# Altium PCB RF-Remute-FT.PcbDoc
Units mm, origin at the board's own origin, x right, y up, seen from the top; angles counter-clockwise.
Board outline 30 x 30 mm, 2 copper layers (Top Layer, Bottom Layer); 15 components, 10 nets, 40 pads, 0 vias.
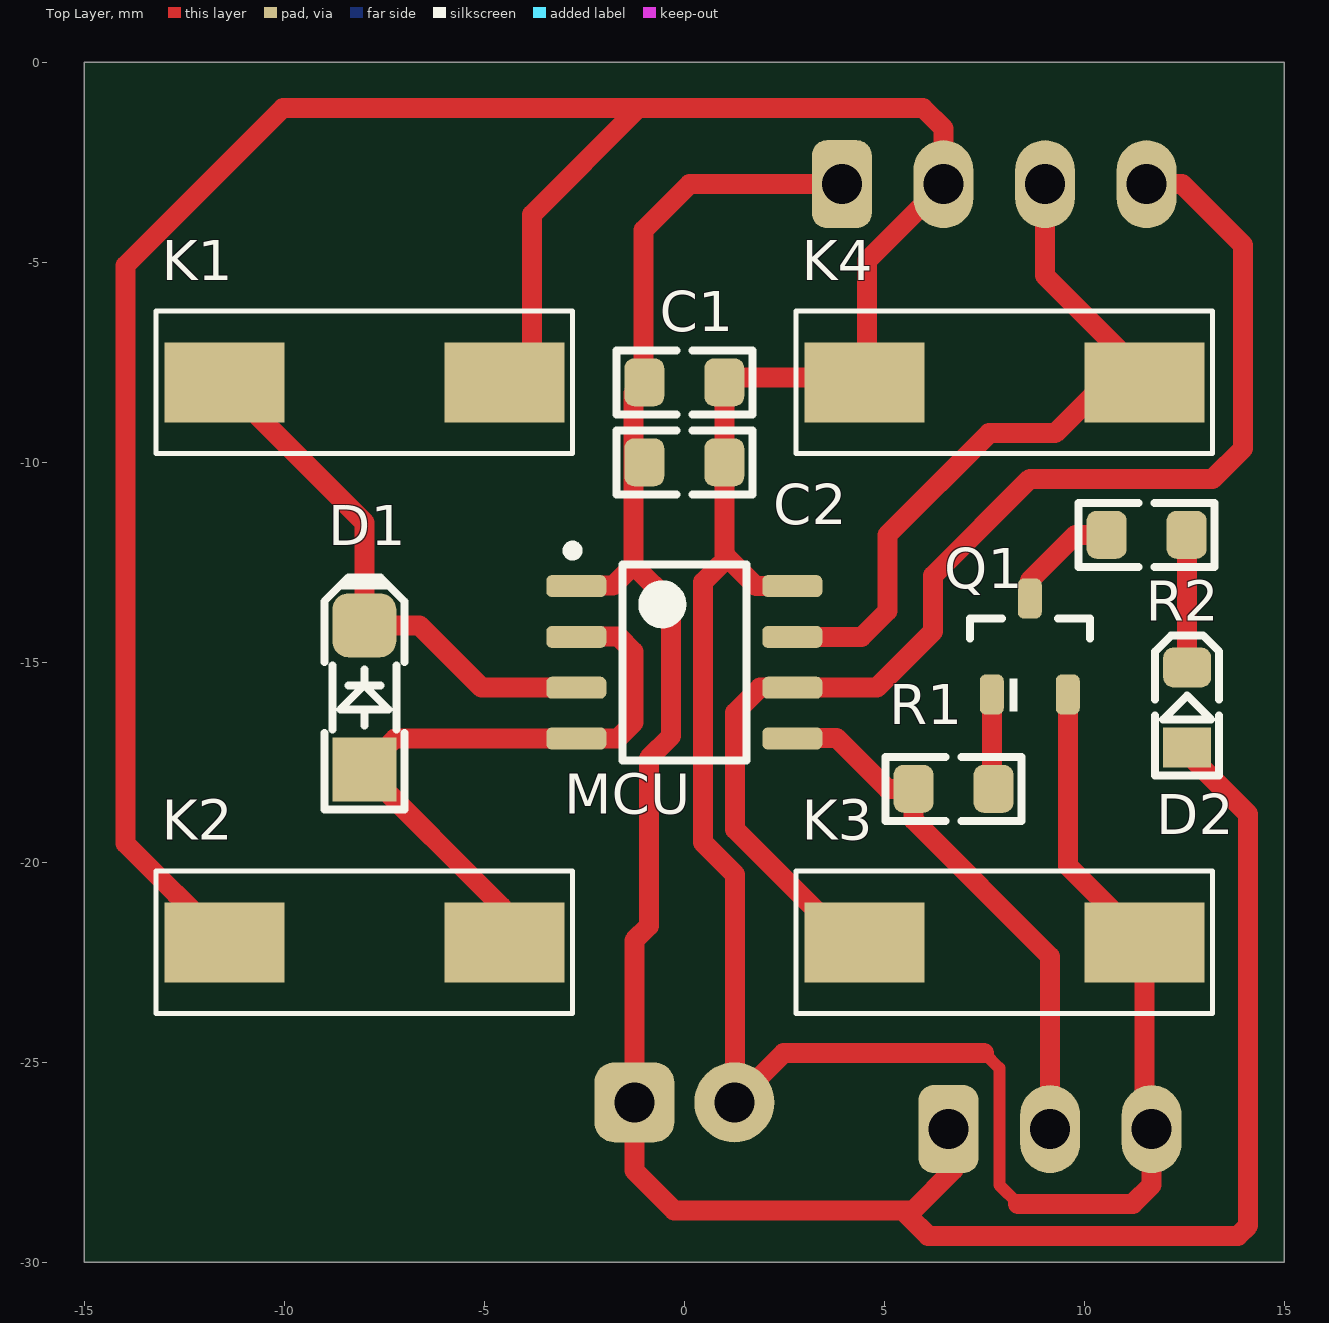
[diagram p0: Top Layer view]
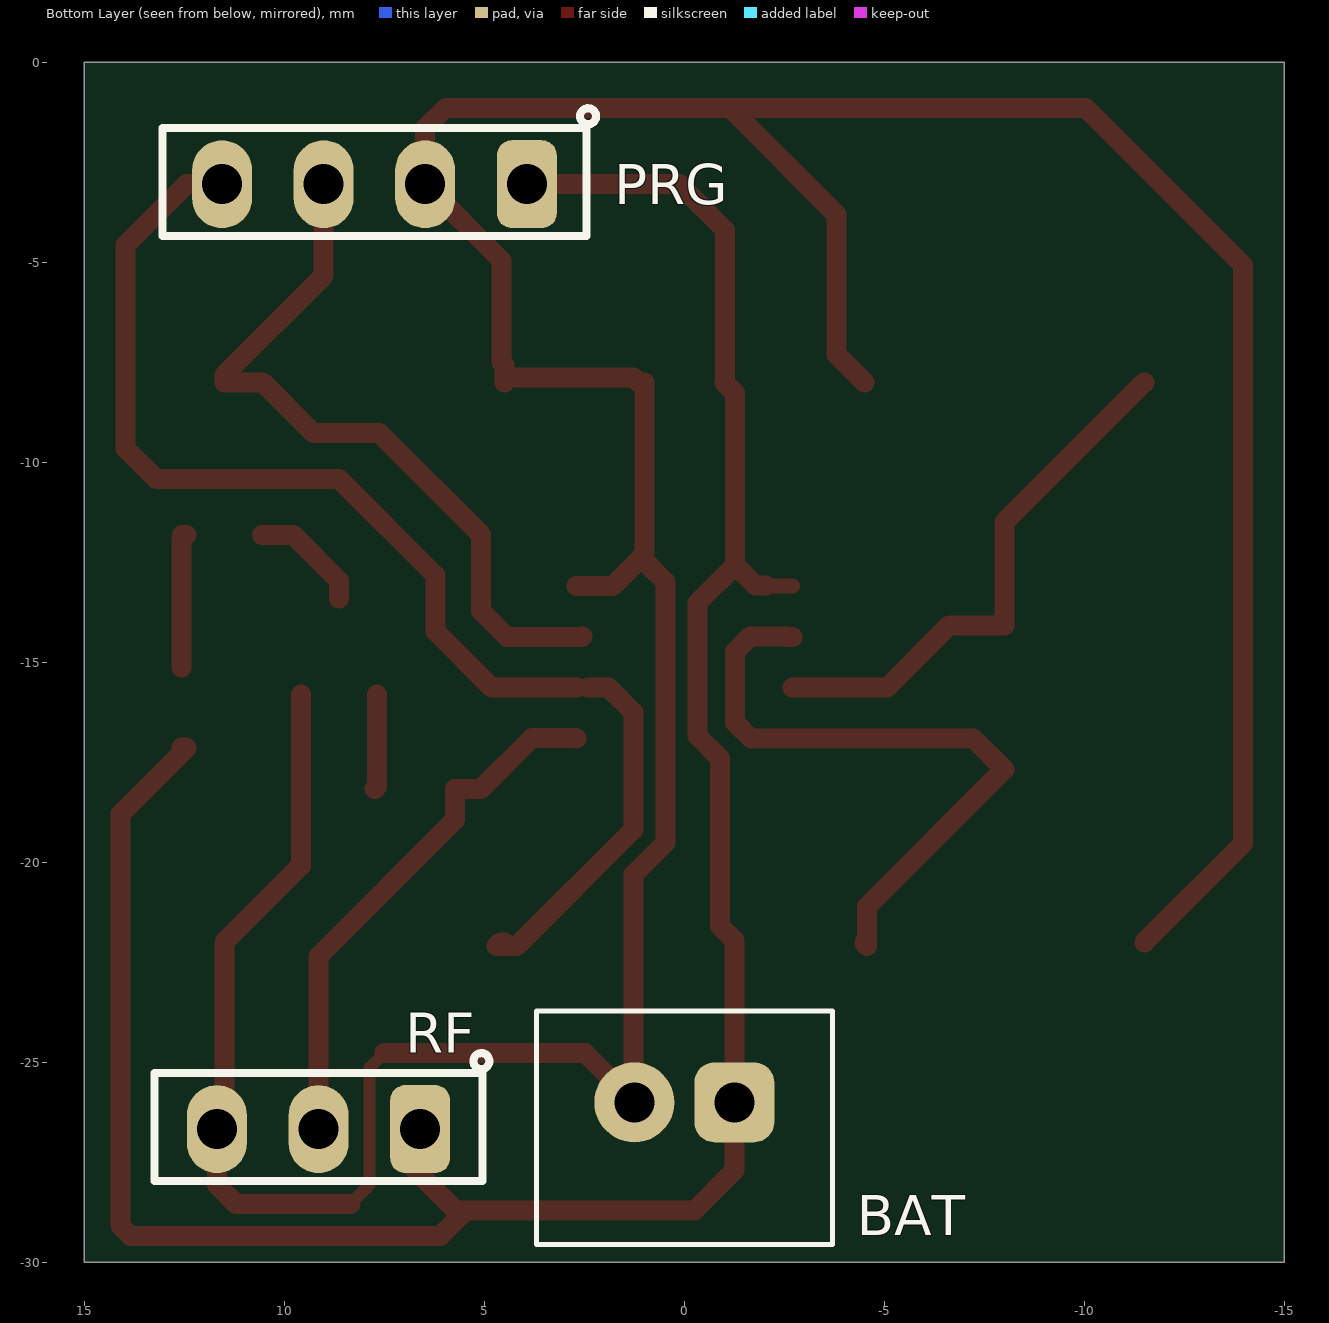
[diagram p1: Bottom Layer view, seen from below]

## Layer stack, top to bottom
Top Solder: solder mask 0.0102, Solder Resist, Dk 3.5
Top Layer: signal copper 0.0356
Dielectric 1: dielectric 0.32, FR-4, Dk 4.8
Bottom Layer: signal copper 0.0356
Bottom Solder: solder mask 0.0102, Solder Resist, Dk 3.5

## Board outline
-15,-30 -15,0 15,0 15,-30

## Design rules (kind name [scope] priority, off if disabled: settings)
Clearance [All] p1: gap=0.3 ignorepadtopadclearanceinfootprint=FALSE
PolygonConnect [All] p1: connectstyle=Relief reliefconductorwidth=0.254 reliefentries=4 polygonreliefangle="90 Angle" airgapwidth=0.254
RoutingVias [All] p1: holewidth=0.711 width=1.27 viastyle="Through Hole" minholewidth=0.711 minwidth=1.27 maxholewidth=0.711 maxwidth=1.27
SolderMaskExpansion [All] p1: expansion=0.102 istentingtop=FALSE
Width [All] p1: maxlimit=0.5 minlimit=0.254 preferedwidth=0.3 toplayer_minwidth=0.3 bottomlayer_maxwidth=0.254 bottomlayer_prefwidth=0.254 minimp=50.000000 maximp=50.000000 favimp=50.000000
30 further rules are at their usual default settings.

## Components (designator, comment, footprint, x,y, rotation, side; value= is the part's Value field where it differs from the comment)
BAT "XH 2" "XH 2 PIN ( White )" 0,-26 r180 bottom
C1 "Capacitor SMD 0805" C0805 0,-8 r180 top value=10uF
C2 "Capacitor SMD 0805" C0805 0,-10 r180 top value=100nF
D1 "1N4148 SMD" D_SOD80 -8.001,-15.875 r90 top value=1N4148
D2 "LED SMD 0805" "LED SMD 0805 (Green)" 12.573,-16.129 r90 top
K1 "Button" BUTTON -8,-8 r180 top
K2 "Button" BUTTON -8,-22 r0 top
K3 "Button" BUTTON 8,-22 r180 top
K4 "Button" BUTTON 8,-8 r0 top
MCU "FT61EC21A" SOP-8 0,-15 r0 top
PRG "Female Header Single 4" HDR_F_1X4 7.747,-3.048 r0 bottom
Q1 "C945 NPN SMD" SOT-23 8.636,-14.605 r90 top value="C945 SMD"
R1 "Resistor SMD 0805" R0805 6.731,-18.161 r180 top value=1K
R2 "Resistor SMD 0805" R0805 11.557,-11.811 r0 top value=1K
RF "Female Header Single 3" HDR_F_1X3 9.144,-26.67 r0 bottom

## Footprints (in the part's own frame and the unit in brackets; to place one, negate y for a bottom-side part, rotate by r counter-clockwise, add the part's x,y. Pads: shape width x height; smd on the part's side, far side on the other; paste and mask are expansions set on the pad)
BUTTON [mm] "KEY"
  rect 3x2 smd: 1(-3.5,0) 2(3.5,0)
  silkscreen extent -5.21,-1.78 5.21,1.78, body extent -5,-1.75 5,1.75, height 4.35
C0805 [mm] "CHIP Capacitor, 2.0X1.3mm, 0805 (Make www.tarahiboard.com)"
  rrect50% 1x1.2 smd mask+0.075: 1(-1,0) 2(1,0)
  Top Layer pour cut-out: -0.5,0.8 0.5,0.8 0.5,-0.8 -0.5,-0.8
  silkscreen extent -1.7,-0.8 1.7,0.8, body extent -1,-0.62 1,0.63, height 1
D_SOD80 [mm] "SOD-80 MINI-MELF 3.6X1.6mm, LL-34, LL4148 (Make www.tarahiboard.com)"
  rect 1.6x1.6 smd: 1(-1.8,0)
  rrect50% 1.6x1.6 smd: 2(1.8,0)
  Top Layer pour cut-out: -1.016,1.016 1.016,1.016 1.016,-1.016 -1.016,-1.016
  silkscreen extent -2.8,-1 3,1, body extent -1.85,-0.8 1.85,0.8, height 2
HDR_F_1X3 [mm] "HEADER FEMALE pitch: 2.54mm (Make www.tarahiboard.com)"
  rrect50% 1.5x2.2 hole 1 mask+0.1: 1(-2.54,0)
  oval 1.5x2.2 hole 1 mask+0.1: 2(0,0) 3(2.54,0)
  silkscreen extent -4.27,-1.9 4.1,1.3, body extent -3.93,-1.3 3.94,1.2, height 8.5
HDR_F_1X4 [mm] "HEADER FEMALE pitch: 2.54mm (Make www.tarahiboard.com)"
  rrect50% 1.5x2.2 hole 1 mask+0.1: 1(-3.81,0)
  oval 1.5x2.2 hole 1 mask+0.1: 2(-1.27,0) 3(1.27,0) 4(3.81,0)
  silkscreen extent -5.54,-1.9 5.3,1.3, body extent -5.2,-1.3 5.21,1.2, height 8.5
"LED SMD 0805 (Green)" [mm] "(Make www.tarahiboard.com)"
  rect 1x1.2 smd mask+0.075: 1(-1,0)
  rrect50% 1x1.2 smd mask+0.075: 2(1,0)
  silkscreen extent -1.7,-0.8 1.8,0.8, body extent -1,-0.63 1,0.63, height 0.7
R0805 [mm] "CHIP RESISTOR 1/8 WATT ,2.0X1.3mm, 0805, 2012 (Make www.tarahiboard.com)"
  rrect50% 1x1.2 smd mask+0.05: 1(-1,0) 2(1,0)
  Top Layer pour cut-out: -0.5,0.8 0.5,0.8 0.5,-0.8 -0.5,-0.8
  silkscreen extent -1.7,-0.8 1.7,0.8, body extent -1.15,-0.67 1.15,0.68, height 0.76
SOP-8 [mm]
  rrect50% 1.5x0.55 smd: 1(-2.7,1.905) 2(-2.7,0.635) 3(-2.7,-0.635) 4(-2.7,-1.905) 5(2.7,-1.905) 6(2.7,-0.635) 7(2.7,0.635) 8(2.7,1.905)
  silkscreen extent -2.92,-2.45 1.55,2.92, body extent -2.99,-2.45 2.99,2.45, height 1.35
SOT-23 [mm] "SOT23, 3-Leads, Body 2.9x1.3mm, Pitch 0.95mm, Lead Span 2.5mm, IPC Medium Density (Make www.tarahiboard.com)"
  rrect50% 1x0.6 smd: 1(-1.2,0.95) 2(-1.2,-0.95) 3(1.2,0)
  silkscreen extent -1.62,-1.5 0.7,1.5, body extent -1.16,-1.45 1.21,1.45, height 1
"XH 2 PIN ( White )" [mm] "(Make www.tarahiboard.com)"
  round 2 hole 1: 1(-1.25,0)
  rrect50% 2x2 hole 1: 2(1.25,0)
  silkscreen extent -3.7,-3.56 3.7,2.29, body extent -3.7,-3.56 3.7,2.24, height 7

## Part data
BAT: library part "Conector XH 2 Pin", "Conector XH 2 Pin", ComponentLink1Description=Tarahiboard, ComponentLink1URL=https://www.tarahiboard.com/product/library-pack, DatasheetVersion=2022
C1 C2: "Capacitor C SMD 0805", ComponentLink1Description=Tarahiboard, ComponentLink1URL=https://www.tarahiboard.com, DatasheetVersion=2022
D1: "DIODE, FAST SWTICHING, 0.3A, 0.5W", ComponentLink1Description=Tarahiboard, ComponentLink1URL=https://www.tarahiboard.com/product/library-pack, DatasheetVersion=2022
K1 K2 K3 K4: library part BUTTON-6.3.4-SMD, Actuator Color=Brown, Contact Current Rating=50mA, Contact Resistance=100mR, Manufacturer=Panasonic, Manufacturer Part Number=EVQ-PE605T, Max Operating Temperature=85°C, Max Voltage Rating (DC)=12V, Min Operating Temperature=-30°C, Operating Force=2.4N, Package Quantity=1000, Supplier Part Number 1=P13592S-ND, Actuator Length=1.5mm, Actuator Type=Standard, Category="Tactile Switches", ComponentLink1Description=https://datasheet.ciiva.com/25603/0900766b810ad3e5-25603911.pdf?src-supplier=RSComponents, ComponentLink1URL=https://datasheet.ciiva.com/25603/0900766b810ad3e5-25603911.pdf?src-supplier=RSComponents, ComponentLink2Description=https://datasheet.ciiva.com/30091/atv0000ce8-30091136.pdf?src-supplier=Onlinecomponents.com, ComponentLink2URL=https://datasheet.ciiva.com/30091/atv0000ce8-30091136.pdf?src-supplier=Onlinecomponents.com, ComponentLink3Description=https://datasheet.ciiva.com/16377/atk0000ce35-16377527.pdf?src-supplier=Future+Electronics, ComponentLink3URL=https://datasheet.ciiva.com/16377/atk0000ce35-16377527.pdf?src-supplier=Future+Electronics, ComponentLink4Description=https://datasheet.ciiva.com/16155/atv0000ce8-16155306.pdf?src-supplier=Onlinecomponents.com, ComponentLink4URL=https://datasheet.ciiva.com/16155/atv0000ce8-16155306.pdf?src-supplier=Onlinecomponents.com, Contact Plating=Silver, Current Rating=50mA, Electrical Life=30000Cycles, Illumination Type=Non-Illuminated,Illuminated, Lead Free="Lead Free", Mechanical Life=30000Cycles, Mount="Through Hole", Orientation=Straight, Packaging=Bulk, Pricing 1="1=0.42000, 10=0.41000, 25=0.38600, 100=0.33510, 250=0.30400, 500=0.28280, 1000=0.25452, 2500=0.23897, 5000=0.22200 (USD)", REACH SVHC="No SVHC", RoHS=Yes, RoHS Compliant=Yes, Series=EVQPE, Size=3.5mm, Stock 1=1845, Supplier 1=Digi-Key, Supplier 2=Digi-Key, Switch Function=Off-Mom, Switch Travel=0.25mm, Termination="PC Pin", Throw Configuration=SPST, Voltage Rating (DC)=12V
PRG RF: "Female, pitch: 2.54mm", ComponentLink1Description=Tarahiboard, ComponentLink1URL=https://www.tarahiboard.com/product/library-pack, DatasheetVersion=2022
D2 Q1: ComponentLink1Description=Tarahiboard, ComponentLink1URL=https://www.tarahiboard.com/product/library-pack, DatasheetVersion=2022
R1 R2: ComponentLink1Description="Website: Tarahiboard", ComponentLink1URL=https://www.tarahiboard.com/product/library-pack, DatasheetVersion=2022

## Nets (pads, with @x,y where several pads share a name; then routed paths per layer and width w, separated by ;. In a path a pad name is that pad's centre, name@x,y a point inside that pad or via, vN(x,y) a via of type N, cw(c..) or ccw(c..) an arc to the next point about the centre after c; other vN are vias at no path point)
COM: D1.1 K2.2 MCU.2 MCU.4 | length 16.6
  Top Layer w0.5: K2.2 -4.5,-22.026 -4.572,-22.098 -4.572,-21.104 D1.1 -7.231,-16.905 MCU.4 -1.665,-16.905 -1.27,-16.51 -1.27,-14.732 -1.651,-14.351 -2.54,-14.351 -2.554,-14.365 MCU.2
DATA: MCU.5 R1.2 RF.2 | length 14.2
  Top Layer w0.5: MCU.5 2.714,-16.891 3.81,-16.891 5.08,-18.161 R1.2 5.731,-18.939 9.144,-22.352 RF.2@9.144,-27.432
GND: BAT.1 C1.1 C2.1 K1.1 K2.1 K3.1 K4.1 MCU.8 PRG.2 Q1.2 RF.3 | length 106.9
  Top Layer w0.3: 7.493,-24.765 7.874,-25.146 7.874,-28.067 8.344,-28.537
  Top Layer w0.5: K2.1 -13.97,-19.53 -13.97,-5.08 -10.033,-1.143 -1.143,-1.143 ; K1.1 -3.81,-7.31 -3.81,-3.81 -1.143,-1.143 ; 0.889,-12.573 0.47,-12.992 0.47,-19.508 1.27,-20.308 1.27,-25.908 1.25,-25.928 BAT.1 2.485,-24.765 7.493,-24.765 ; 1,-12.303 C2.1 C1.1 1.144,-8 1.27,-7.874 4.374,-7.874 K4.1 4.5,-7.565 4.572,-7.493 4.572,-4.953 PRG.2 6.477,-1.651 5.969,-1.143 -1.143,-1.143 ; 1.079,-12.383 1.792,-13.095 MCU.8 ; 8.344,-28.537 11.214,-28.537 11.684,-28.067 RF.3 ; Q1.2 9.586,-20.086 K3.1 RF.3@11.5,-26.67
KEY1: D1.2 K1.2 MCU.3 | length 13.5
  Top Layer w0.5: K1.2 -8.001,-11.499 D1.2 -6.626,-14.075 -5.066,-15.635 MCU.3
KEY3: K3.2 MCU.6 PRG.4 | length 31.9
  Top Layer w0.5: MCU.6@2.413,-15.635 1.891,-15.635 1.27,-16.256 1.27,-19.177 4.191,-22.098 4.699,-22.098 4.601,-22 K3.2 ; MCU.6 4.812,-15.635 6.223,-14.224 6.223,-12.827 8.636,-10.414 13.208,-10.414 13.97,-9.652 13.97,-4.572 12.446,-3.048 PRG.4
KEY4: K4.2 MCU.7 PRG.3 | length 18.7
  Top Layer w0.5: MCU.7@2.54,-14.351 2.554,-14.365 MCU.7 4.431,-14.365 5.08,-13.716 5.08,-11.811 7.62,-9.271 9.271,-9.271 10.542,-8 K4.2 11.5,-7.817 9.017,-5.334 PRG.3
NetD2_2: D2.2 R2.2 | length 3.5
  Top Layer w0.5: R2.2 12.446,-11.811 12.573,-11.938 D2.2
NetQ1_1: Q1.1 R1.1 | length 2.4
  Top Layer w0.5: Q1.1 7.686,-18.1 7.747,-18.161 R1.1
NetQ1_3: Q1.3 R2.1 | length 2.8
  Top Layer w0.5: Q1.3 8.636,-12.954 9.779,-11.811 R2.1
VCC: BAT.2 C1.2 C2.2 D2.1 MCU.1 PRG.1 RF.1 | length 62.4
  Top Layer w0.381: MCU.1 -2.046,-13.095 MCU.1@-2.032,-13.081
  Top Layer w0.5: MCU.1@-2.032,-13.081 -1.778,-13.081 -1.27,-12.573 ; PRG.1 0.127,-3.048 -1.016,-4.191 -1.016,-7.984 C1.2 -1.27,-8.27 -1.27,-12.573 ; RF.1@6.604,-27.432 6.604,-27.559 6.731,-27.686 5.715,-28.702 5.461,-28.702 ; D2.1 12.462,-17.129 12.446,-17.145 14.097,-18.796 14.097,-29.083 13.843,-29.337 6.096,-29.337 5.588,-28.829 5.461,-28.702 ; -1.27,-12.573 -0.33,-13.513 -0.33,-16.84 -0.889,-17.399 -0.889,-21.59 -1.25,-21.951 BAT.2 -1.25,-27.706 -0.254,-28.702 5.461,-28.702

## Silkscreen, mask and mechanical layers (free items; w line width, h text height)
Mechanical 13:
  the board outline again, w0.1